# EAGLE board bbAutomationShield2 (EAGLE 6.5.0)
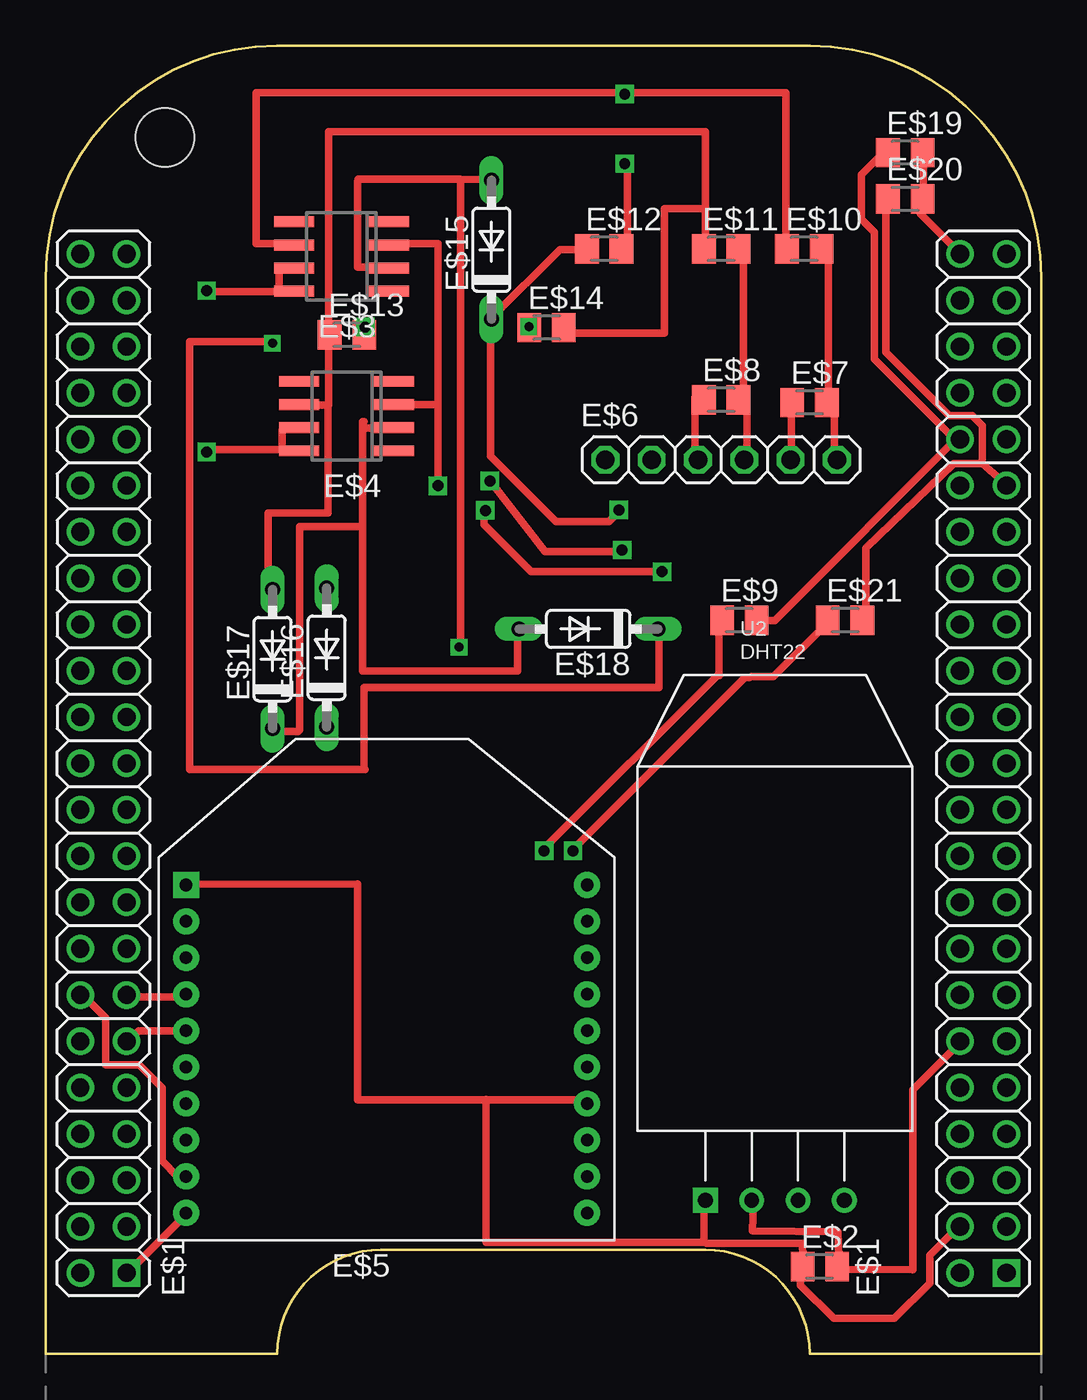
[diagram p0: board, top side]
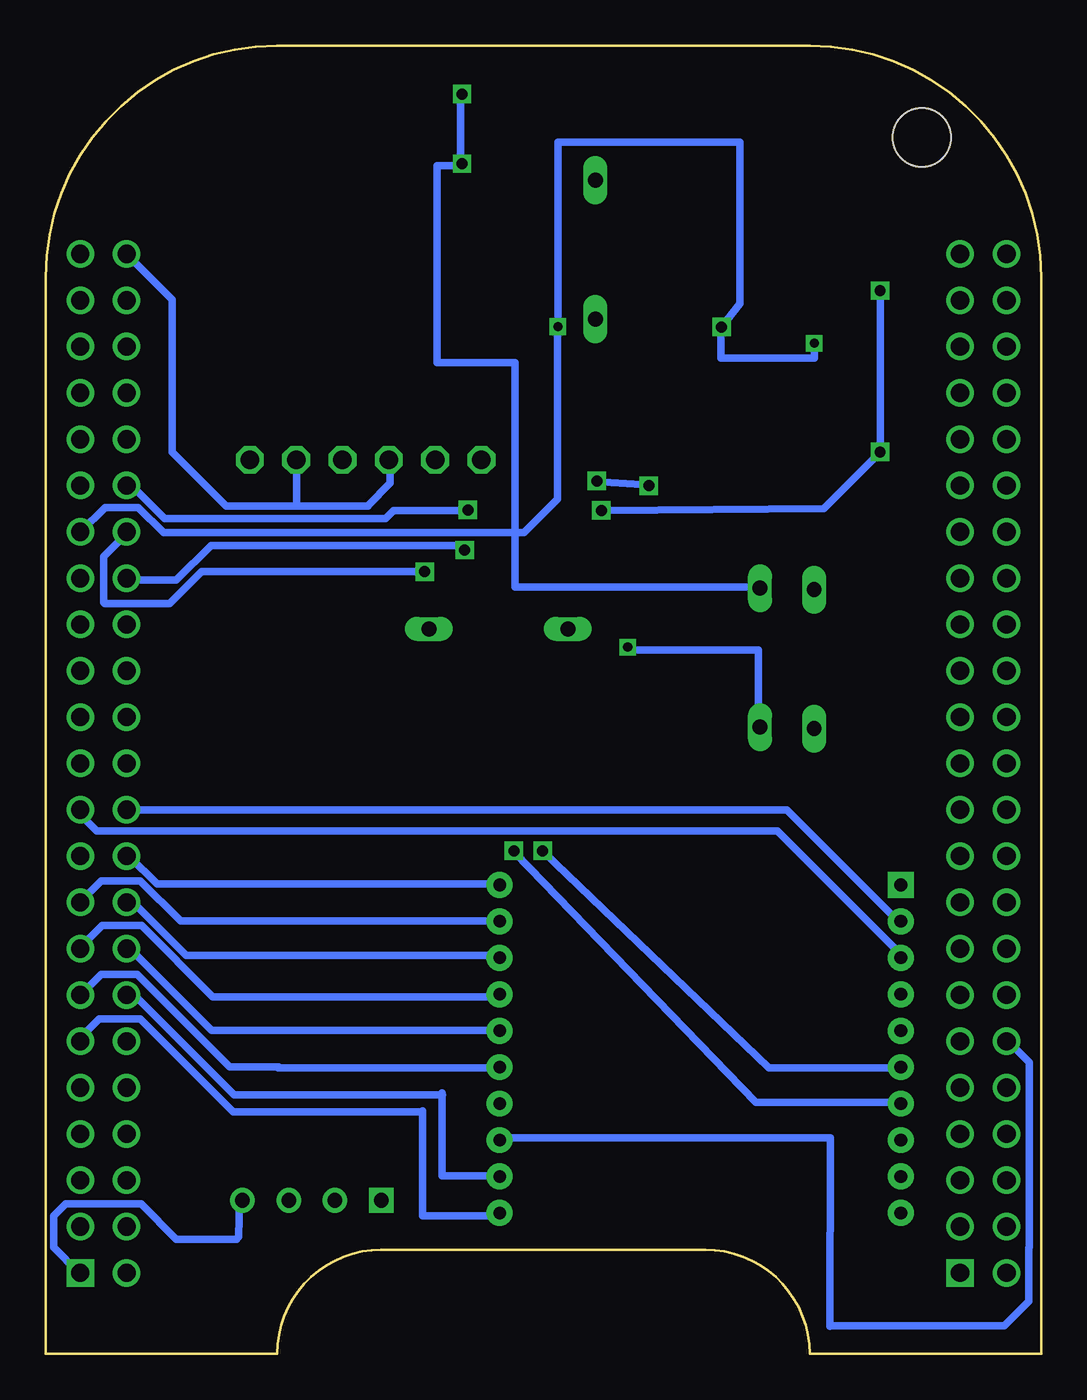
[diagram p1: board, bottom side, seen from below]

Size 54.61 x 71.75 mm. Coordinates in mm from the lower left corner, seen from the top.
Copper layers (1*16): Top 0.035mm / dielectric 1.5mm / Bottom 0.035mm
Design rules "default": minimum track width 10mil, minimum drill 24mil, track to track 8mil, track to pad 8mil, pad to pad 8mil, via to via 8mil, smd to smd 8mil, copper to edge 40mil, drill to drill 8mil, minimum pad ring 10mil, minimum via ring 8mil, stop-mask expansion 4mil, vias tented up to drill 0mil, thermal gap 10mil
Holes 3.2 mm at 6.54,66.71

## Footprints (pad centres in the part's own frame; a part is rotated, then mirrored left to right if it is on the bottom)
BEAGLEBONE_SHIELD = drill 1 square: 1 4.445,19.05; 47 52.705,19.05 | drill 1: 2 1.905,19.05; 3 4.445,21.59; 4 1.905,21.59; 5 4.445,24.13; 6 1.905,24.13; 7 4.445,26.67; 8 1.905,26.67; 9 4.445,29.21; 10 1.905,29.21; 11 4.445,31.75; 12 1.905,31.75; 13 4.445,34.29; 14 1.905,34.29; 15 4.445,36.83; 16 1.905,36.83; 17 4.445,39.37; 18 1.905,39.37; 19 4.445,41.91; 20 1.905,41.91; 21 4.445,44.45; 22 1.905,44.45; 23 4.445,46.99; 24 1.905,46.99; 25 4.445,49.53; 26 1.905,49.53; 27 4.445,52.07; 28 1.905,52.07; 29 4.445,54.61; 30 1.905,54.61; 31 4.445,57.15; 32 1.905,57.15; 33 4.445,59.69; 34 1.905,59.69; 35 4.445,62.23; 36 1.905,62.23; 37 4.445,64.77; 38 1.905,64.77; 39 4.445,67.31; 40 1.905,67.31; 41 4.445,69.85; 42 1.905,69.85; 43 4.445,72.39; 44 1.905,72.39; 45 4.445,74.93; 46 1.905,74.93; 48 50.165,19.05; 49 52.705,21.59; 50 50.165,21.59; 51 52.705,24.13; 52 50.165,24.13; 53 52.705,26.67; 54 50.165,26.67; 55 52.705,29.21; 56 50.165,29.21; 57 52.705,31.75; 58 50.165,31.75; 59 52.705,34.29; 60 50.165,34.29; 61 52.705,36.83; 62 50.165,36.83; 63 52.705,39.37; 64 50.165,39.37; 65 52.705,41.91; 66 50.165,41.91; 67 52.705,44.45; 68 50.165,44.45; 69 52.705,46.99; 70 50.165,46.99; 71 52.705,49.53; 72 50.165,49.53; 73 52.705,52.07; 74 50.165,52.07; 75 52.705,54.61; 76 50.165,54.61; 77 52.705,57.15; 78 50.165,57.15; 79 52.705,59.69; 80 50.165,59.69; 81 52.705,62.23; 82 50.165,62.23; 83 52.705,64.77; 84 50.165,64.77; 85 52.705,67.31; 86 50.165,67.31; 87 52.705,69.85; 88 50.165,69.85; 89 52.705,72.39; 90 50.165,72.39; 91 52.705,74.93; 92 50.165,74.93
M0805 = smd 1.3 x 1.6: 1 -0.95,0; 2 0.95,0
SO-08 = smd 0.6 x 2.2: 1 -1.905,-2.6; 2 -0.635,-2.6; 3 0.635,-2.6; 4 1.905,-2.6; 5 1.905,2.6; 6 0.635,2.6; 7 -0.635,2.6; 8 -1.905,2.6
XBEE = drill 0.7 pad 1.422 square: 1 -11,5.5 | drill 0.7 pad 1.422: 2 -11,3.5; 3 -11,1.5; 4 -11,-0.5; 5 -11,-2.5; 6 -11,-4.5; 7 -11,-6.5; 8 -11,-8.5; 9 -11,-10.5; 10 -11,-12.5; 11 11,-12.5; 12 11,-10.5; 13 11,-8.5; 14 11,-6.5; 15 11,-4.5; 16 11,-2.5; 17 11,-0.5; 18 11,1.5; 19 11,3.5; 20 11,5.5
1X06 = drill 1.016 octagon: 1 -6.35,0; 2 -3.81,0; 3 -1.27,0; 4 1.27,0; 5 3.81,0; 6 6.35,0
DO35-7 = drill 0.813 long: A 3.81,0; C -3.81,0
AM2302 = drill 0.8 pad 1.35 square: P$1 -3.81,-13.8 | drill 0.8 pad 1.35: P$2 -1.27,-13.8; P$3 1.27,-13.8; P$4 3.81,-13.8

## Placement (x,y rotation side)
E$1  [BEAGLEBONE_SHIELD]  0,-14.61 0 top
E$2  [M0805]  42.47,4.79 0 top
E$3  [SO-08]  16.22,60.18 90 top
E$4  [SO-08]  16.51,51.44 90 top
E$5  [XBEE]  18.7,20.23 0 top
E$6  [1X06]  37.06,49.04 0 top
E$7  [M0805]  41.9,52.18 0 top
E$8  [M0805]  37.06,52.32 0 top
E$9  [M0805]  38.05,40.24 0 top
E$10  [M0805]  41.62,60.6 0 top
E$11  [M0805]  37.06,60.6 0 top
E$12  [M0805]  30.64,60.6 0 top
E$13  [M0805]  16.53,55.89 0 top
E$14  [M0805]  27.48,56.28 0 top
E$15  [DO35-7]  24.46,60.56 90 top
E$16  [DO35-7]  15.42,38.19 90 top
E$17  [DO35-7]  12.45,38.11 90 top
E$18  [DO35-7]  29.77,39.76 180 top
E$19  [M0805]  47.15,65.87 0 top
E$20  [M0805]  47.15,63.34 0 top
E$21  [M0805]  43.85,40.24 0 top
U2  DHT22  [AM2302]  40.01,22.22 0 top

## Library data of the parts
E$1 E$2 E$5-E$21 = adafruit
E$3 E$4 = texas
U2 = sensor

## Tracks (layer width: path | path; a pad name or v marks a point on that pad's centre or on a via)
N$3
  Bottom 0.406: 50.12,57.89 50.12,57.77
N$5
  Top 0.406: 47.56,4.61 47.56,14.48 50.12,17.03
N$6
  Bottom 0.406: 29.78,19.59 45.44,19.59 49.35,23.5 51.49,23.5 52.71,22.28
N$7
  Bottom 0.406: 29.66,21.85 46.9,21.85 49.84,24.79
N$8
  Bottom 0.406: 29.72,23.75 47.21,23.75 49.41,25.95 51.55,25.95 52.78,24.73
N$9
  Bottom 0.406: 29.72,25.77 48.49,25.77 50.02,27.3
N$10
  Bottom 0.406: 29.9,15.68 40.97,15.68
N$11
  Bottom 0.406: 29.77,17.74 42.9,17.74
N$12
  Bottom 0.406: 41.01,15.68 41.86,15.68
N$13
  Bottom 0.406: 11.59,1.54 2.02,1.54 0.67,2.89 0.67,5.83
N$14
  Bottom 0.406: 44.13,6.3 47.44,6.3 49.38,8.23 53.5,8.23 54.16,7.57 54.16,5.84 52.79,4.46
N$15  (via drill 0.6)
  other vias: 31.62,44.09
N$16
  Top 0.406: 31.62,44 27.39,44 24.46,47.78
N$17  (via drill 0.6)
  other vias: 24.37,47.88
N$18
  Bottom 0.406: 24.41,47.83 21.91,47.67 21.57,47.65
N$19
  Bottom 0.406: 34.06,13.29 44.34,13.29 49.41,18.37 51.67,18.37 52.78,17.27
N$20
  Bottom 0.406: 32.84,14.21 44.27,14.21 49.78,19.71
N$21
  Bottom 0.406: 41.83,15.74 44.52,15.74 49.6,20.81 51.55,20.81 52.65,19.71
N$22
  Bottom 0.406: 42.81,17.75 45.5,17.75 49.9,22.16
N$23
  Bottom 0.406: 11.58,11.84 11.58,1.51
N$26  (via drill 0.6)
  other vias: 24.12,46.26
N$27
  Bottom 0.406: 24.07,46.25 11.92,46.36 8.85,49.44
N$28
  Bottom 0.406: 7.82,21.69 7.82,22.02 14.48,28.68 51.8,28.68 52.85,29.74
N$29
  Bottom 0.406: 26.49,66.45 26.49,56.36
N$30
  Bottom 0.406: 26.54,56.26 26.54,46.88 28.38,45.04 48.14,45.04 49.52,46.42 51.35,46.42 52.68,45.09
N$31
  Bottom 0.406: 50.23,42.44 47.44,42.44 45.54,44.34 31.84,44.34 31.46,43.96
N$32
  Top 0.406: 29.53,60.56 28.21,60.56 24.42,56.77 24.42,49.25 27.98,45.68
N$34
  Bottom 0.406: 50.21,29.84 13.96,29.84 7.82,23.7
N$35
  Bottom 0.406: 35.71,48.94 35.71,47.75 36.93,46.54
N$36
  Bottom 0.406: 36.93,46.51 40.85,46.51 | 40.85,46.51 40.85,49.09 | 40.85,46.51 44.71,46.51 47.67,49.47 47.67,57.83 50.27,60.44
N$37
  Top 0.406: 7.62,7.63 7.62,7.56 4.46,4.39
N$38
  Top 0.406: 7.62,19.58 4.59,19.58 4.46,19.71
N$39
  Top 0.406: 7.62,17.71 5.1,17.71 4.52,17.13
S$1  (via drill 0.6)
  Bottom 0.406: v8.84,58.32 v8.84,49.47
S$2  (via drill 0.6)
  Top 0.406: v21.52,47.61 21.52,60.88 19.24,60.88
S$3  (via drill 0.6)
  Top 0.406: 24.04,46.36 24.04,45.48 26.62,42.9 v33.81,42.9
S$4
  Top 0.406: 43.25,49.58 43.25,52.41 42.94,52.41 42.94,60.81
S$5
  Top 0.406: 38.48,48.9 38.48,52.32
S$6
  Top 0.406: 35.63,49.04 35.63,52.47
S$7
  Top 0.406: 40.9,49.04 40.9,52.04
S$8
  Bottom 0.406: 33.7,42.9 46.05,42.9 47.81,41.15 51.38,41.15 51.43,41.2 51.43,43.73 50.17,44.99
S$9  (via drill 0.6)
  other vias: 31.44,46.29
S$10  (via drill 0.6)
  Bottom 0.406: v17.53,56.32 16.53,57.6 16.53,66.45 26.37,66.45
S$11
  Top 0.406: 28,45.65 30.9,45.65 31.45,46.2
S$12
  Bottom 0.406: 31.45,46.25 35.51,46.25 35.95,45.81 48.08,45.81 50.01,47.74
S$13
  Bottom 0.406: 7.67,15.7 14.94,15.7 27.29,27.53
S$14
  Bottom 0.406: 7.67,13.8 15.65,13.8 28.86,27.47
S$15
  Top 0.406: 13.04,50.69 12.98,50.69 12.98,49.59 8.86,49.59
S$16
  Top 0.406: 38.28,60.19 38.28,52.49 38.26,52.49
S$17
  Top 0.406: 40.62,61.17 40.62,69.16 11.54,69.16 11.54,60.88 13.11,60.88
S$18
  Top 0.406: 36.2,60.88 36.2,67.02 15.54,67.02 15.54,52.04 14.54,52.04
S$19  (via drill 0.6)
  other vias: 31.76,65.28
S$20  (via drill 0.6)
  other vias: 27.34,27.59
S$21  (via drill 0.6)
  other vias: 31.76,69.1
S$22
  Bottom 0.406: 31.86,69.05 31.86,65.23 31.81,65.23
S$23
  Top 0.406: 31.91,65.23 31.91,60.32 31.95,60.32
S$24
  Top 0.406: 36.18,62.87 36.18,62.81 33.95,62.81 33.95,56 28.62,56
S$25  (via drill 0.5)
  other vias: 26.51,56.34
S$26
  Top 0.406: 17.1,64.31 17.1,59.6 18.39,59.6
S$27
  Top 0.406: 17.15,64.42 22.76,64.42 | 22.76,64.42 24.45,64.41 | 22.76,38.6 22.76,64.42
  Bottom 0.406: 15.5,34.23 15.5,38.6 22.76,38.6
S$28  (via drill 0.6)
  other vias: 28.93,27.59
S$29
  Bottom 0.406: 31.91,65.33 31.91,65.16 33.15,65.16 33.15,54.36 28.86,54.36 28.86,42.07 15.42,42.07
S$30
  Top 0.406: 13.94,34.23 13.94,45.37 17.4,45.37 17.4,51.14 17.48,51.14
S$31  (via drill 0.5)
  other vias: 22.68,38.77
S$32
  Top 0.406: 15.5,51.97 15.5,46.11 12.21,46.11 12.21,41.82 12.37,41.82
S$33
  Top 0.406: 12.53,34.15 13.85,34.15
S$34
  Top 0.406: 17.44,50.68 17.44,50.79 18.66,50.79
S$35
  Top 0.406: 17.4,45.45 17.4,37.45 25.89,37.45 25.89,39.76 26.14,39.76
S$36
  Top 0.406: 7.92,32.17 7.92,55.51 12.45,55.51
S$37  (via drill 0.5)
  Bottom 0.406: 17.56,56.34 17.56,54.61 12.45,54.61 v12.45,55.43
S$38
  Top 0.406: 36.92,37.22 36.92,40.23 36.84,40.31
S$39
  Top 0.406: 38.74,37.14 39.92,37.14 42.93,40.15
S$40
  Bottom 0.406: 29.39,11.84 11.58,11.84
S$41
  Top 0.406: 43.93,4.61 47.57,4.63
S$42
  Top 0.406: 38.97,40.23 39.99,40.23 50.12,50.35
S$43
  Top 0.406: 44.98,40.23 44.98,44.19 49.8,48.83 51.38,48.83 52.65,47.74
S$44
  Top 0.406: 7.83,25.75 17.1,25.77 17.1,13.93 29.54,13.93
S$45
  Top 0.406: 24.16,13.97 24.16,6.12 36.12,6.12 36.12,8.41
S$46
  Top 0.406: 36.24,6.07 41.51,6.07 41.56,4.58
S$47
  Top 0.406: 43.51,5.32 43.45,6.7 38.76,6.75 38.81,8.24
S$48
  Bottom 0.406: 44.02,6.41 43.97,8.47
S$49
  Top 0.406: 50.12,50.27 49.73,50.27 45.46,54.55 45.46,61.51 44.74,62.22 44.74,64.68 46.09,66.02
S$50
  Top 0.406: 51.39,49.09 51.39,50.91 50.83,51.46 49.57,51.46 46.09,54.94 46.09,63.25 46.01,63.33
S$51
  Top 0.406: 48.14,65.7 48.14,63.25 47.99,63.09 47.99,62.54 50.2,60.32
S$52
  Top 0.406: 36.97,37.22 36.84,37.22 27.34,27.72
S$53
  Top 0.406: 33.64,39.67 33.64,36.54 17.48,36.54 17.48,32.17
S$54
  Top 0.406: 38.61,37.09 38.35,37.09 28.93,27.66
S$55
  Top 0.406: 7.92,32.05 17.51,32.05
S$56
  Top 0.406: 7.64,9.72 7.25,9.72 6.39,10.58 6.39,14.61 5.14,15.86 3.29,15.86 3.29,18.43 2.17,19.55
S$57
  Bottom 0.406: 0.66,5.84 0.66,15.99 1.78,17.11
S$58
  Top 0.406: 41.41,4.59 41.41,3.76 43.23,1.95 46.56,1.95 48.5,3.89 48.5,5.41 50.12,7.03
S$64
  Bottom 0.406: 29.89,7.58 33.94,7.58 33.94,13.33
S$65
  Bottom 0.406: 29.98,9.76 32.85,9.76 32.85,14.32
S$66
  Top 0.406: 12.83,59.47 12.81,59.47 12.81,58.26 8.91,58.26 8.91,58.28
S$67
  Top 0.406: 19.93,52.07 21.52,52.07 21.52,52.06